# EAGLE board 3buttons-3lights-strip (EAGLE 9.6.2)
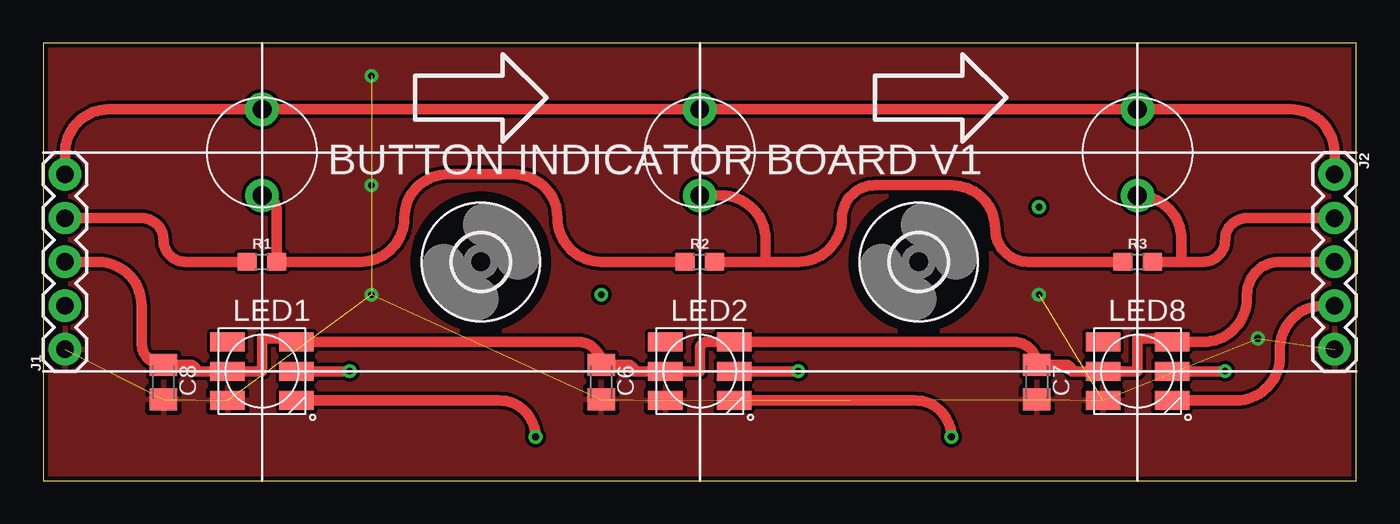
[diagram p0: board, top side]
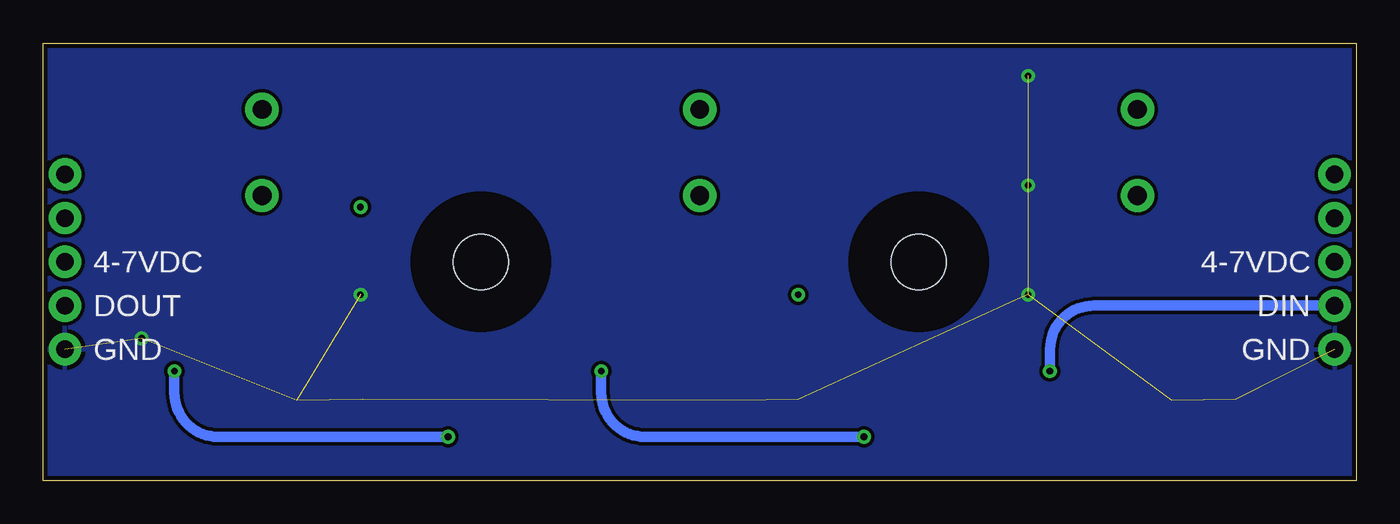
[diagram p1: board, bottom side, seen from below]

Size 76.2 x 25.4 mm. Coordinates in mm from the lower left corner, seen from the top.
Outline: 0,0 76.2,0 76.2,25.4 0,25.4 0,0
Copper layers (1*16): Top 0.035mm / dielectric 1.5mm / Bottom 0.035mm
Design rules "adafruit *": minimum track width 8mil, minimum drill 15.5mil, track to track 8mil, track to pad 8mil, pad to pad 8mil, via to via 8mil, smd to smd 8mil, copper to edge 10mil, drill to drill 8mil, minimum pad ring 10mil, minimum via ring 8mil, stop-mask expansion 4mil, vias tented up to drill 20mil, thermal gap 10mil

## Footprints (pad centres in the part's own frame; a part is rotated, then mirrored left to right if it is on the bottom)
C0805K = smd 1.3 x 1.6: 1 -1,0; 2 1,0
3,2 = hole 3.2: 0,0
1X05 = drill 1.016 pad 1.88: 1 0,0; 2 2.54,0; 3 5.08,0; 4 7.62,0; 5 10.16,0
WS28115050 = smd 2 x 1.1: DI 2,0; DO 2,-1.7; LEDVDD -2,0; NC -2,1.7; VDD 2,1.7; VSS -2,-1.7
0603 = smd 1.1 x 1: 1 -0.85,0; 2 0.85,0
BUTTON = drill 1.1 pad 1.93: P$1 -2.499,0; P$2 2.499,0

## Placement (x,y rotation side)
C6  [C0805K]  32.38,5.71 270 top
C7  [C0805K]  57.66,5.71 270 top
C8  [C0805K]  6.99,5.71 270 top
H3  MOUNT-HOLE3.2  [3,2]  25.4,12.7 0 top
H4  MOUNT-HOLE3.2  [3,2]  50.8,12.7 0 top
J1  [1X05]  1.27,7.62 90 top
J2  [1X05]  74.93,17.78 270 top
LED1  WS28115050  [WS28115050]  12.7,6.35 0 top
LED2  WS28115050  [WS28115050]  38.1,6.35 0 top
LED8  WS28115050  [WS28115050]  63.5,6.35 0 top
R1  10k  [0603]  12.7,12.7 0 top
R2  10k  [0603]  38.1,12.7 0 top
R3  10k  [0603]  63.5,12.7 0 top
U$1  BUTTON  [BUTTON]  12.7,19.05 90 top
U$4  BUTTON  [BUTTON]  38.1,19.05 90 top
U$5  BUTTON  [BUTTON]  63.5,19.05 90 top

## Library data of the parts
C6-C8 = rcl
H3 H4 = holes
J1 J2 = SparkFun-Connectors
LED1 LED2 LED8 = microbuilder
R1-R3 = SparkFun-Resistors; PROD_ID: RES-00824
U$1 U$4 U$5 = spietz-library-2

## Nets
+5V: C6.1 C7.1 C8.1 J1.3 J2.3 LED1.LEDVDD LED1.VDD LED2.LEDVDD LED2.VDD LED8.LEDVDD LED8.VDD
BUTTON: J1.5 J2.1 U$1.P$2 U$4.P$2 U$5.P$2
GND: C6.2 C7.2 C8.2 J1.1 J2.5 LED1.VSS LED2.VSS LED8.VSS
N$1: LED1.DO LED2.DI
N$2: R1.2 R2.1 U$1.P$1
N$3: R2.2 R3.1 U$4.P$1
N$4: J2.2 R3.2 U$5.P$1
N$5: J1.4 R1.1
N$7: LED2.DO LED8.DI
N$8: J1.2 LED1.DI
N$9: J2.4 LED8.DO

## Tracks (layer width: path | path; a pad name or v marks a point on that pad's centre or on a via)
+5V
  Top 0.61: J1.3 3.17,12.7 arc-90 5.71,10.16 5.71,7.99 arc90 C8.1 8.53,6.71 arc-90 8.89,6.35 LED1.LEDVDD 12.7,6.35 12.7,8.26 14.49,8.26 arc-90 LED1.VDD 31.05,8.05 arc-90 C6.1 33.92,6.71 arc-90 34.29,6.35 LED2.LEDVDD 38.1,6.35 38.1,7.62 arc-90 38.53,8.05 LED2.VDD 56.32,8.05 arc-90 C7.1 59.33,6.71 arc-90 59.69,6.35 LED8.LEDVDD 63.5,6.35 63.5,8.26 65.3,8.26 arc-90 LED8.VDD 67.31,8.05 arc90 69.85,10.59 69.85,10.79 arc-90 71.75,12.7 J2.3
BUTTON
  Top 0.61: J1.5 1.27,19.01 arc-90 3.81,21.55 U$1.P$2 U$4.P$2 U$5.P$2 72.39,21.55 arc-90 74.93,19.01 J2.1
GND  (via drill 0.39)  (12 unrouted)
  other vias: 19.05,23.5 19.05,17.14 19.05,10.79 57.78,10.79 70.48,8.26
  pour Top: 0,25.4 0,0 76.2,0 76.2,25.4
  pour Bottom: 0,25.4 0,0 76.2,0 76.2,25.4
N$1  (via drill 0.39)
  Top 0.61: LED1.DO 26.46,4.65 arc-90 v28.57,2.54 | v43.81,6.35 LED2.DI
  Bottom 0.61: v28.57,2.54 41.27,2.54 arc90 43.81,5.08 v43.81,6.35
N$2
  Top 0.61: R2.1 32.38,12.7 arc-90 29.84,15.24 arc90 27.3,17.78 23.5,17.78 arc90 20.95,15.24 arc-90 18.41,12.7 R1.2 13.55,15.7 arc90 U$1.P$1
N$3
  Top 0.61: R2.2 41.91,12.7 | 41.91,12.7 43.81,12.7 arc90 46.35,15.24 arc-90 48.26,17.14 52.7,17.14 arc-90 55.24,14.61 arc90 57.15,12.7 R3.1 | U$4.P$1 39.37,16.55 arc-90 41.91,14.01 41.91,12.7
N$4
  Top 0.61: R3.2 66.04,12.7 | 66.04,12.7 67.31,12.7 arc90 68.58,13.97 arc-90 69.85,15.24 J2.2 | U$5.P$1 arc-90 66.04,14.01 66.04,12.7
N$5
  Top 0.61: J1.4 5.71,15.24 arc-90 6.99,13.97 arc90 8.26,12.7 R1.1
N$7  (via drill 0.39)
  Top 0.61: LED2.DO 50.59,4.65 arc-90 v52.7,2.54 | LED8.DI v68.58,6.35
  Bottom 0.61: v52.7,2.54 66.04,2.54 arc90 68.58,5.08 v68.58,6.35
N$8  (via drill 0.39)
  Top 0.61: LED1.DI v17.78,6.35
  Bottom 0.61: J1.2 15.24,10.16 arc-90 17.78,7.62 v17.78,6.35
N$9
  Top 0.61: LED8.DO 69.22,4.65 arc90 71.75,7.19 71.75,7.62 arc-90 74.3,10.16 J2.4
N$11  (via drill 0.39)
  other vias: 32.38,10.79
N$13  (via drill 0.39)
  other vias: 57.78,15.88

## Text on the board
tPlace: BUTTON INDICATOR BOARD V1
bPlace: 4-7VDC | 4-7VDC | DIN | DOUT | GND | GND